# EAGLE board AtoVproject 16n V1.1 Panel (EAGLE 9.2.2)
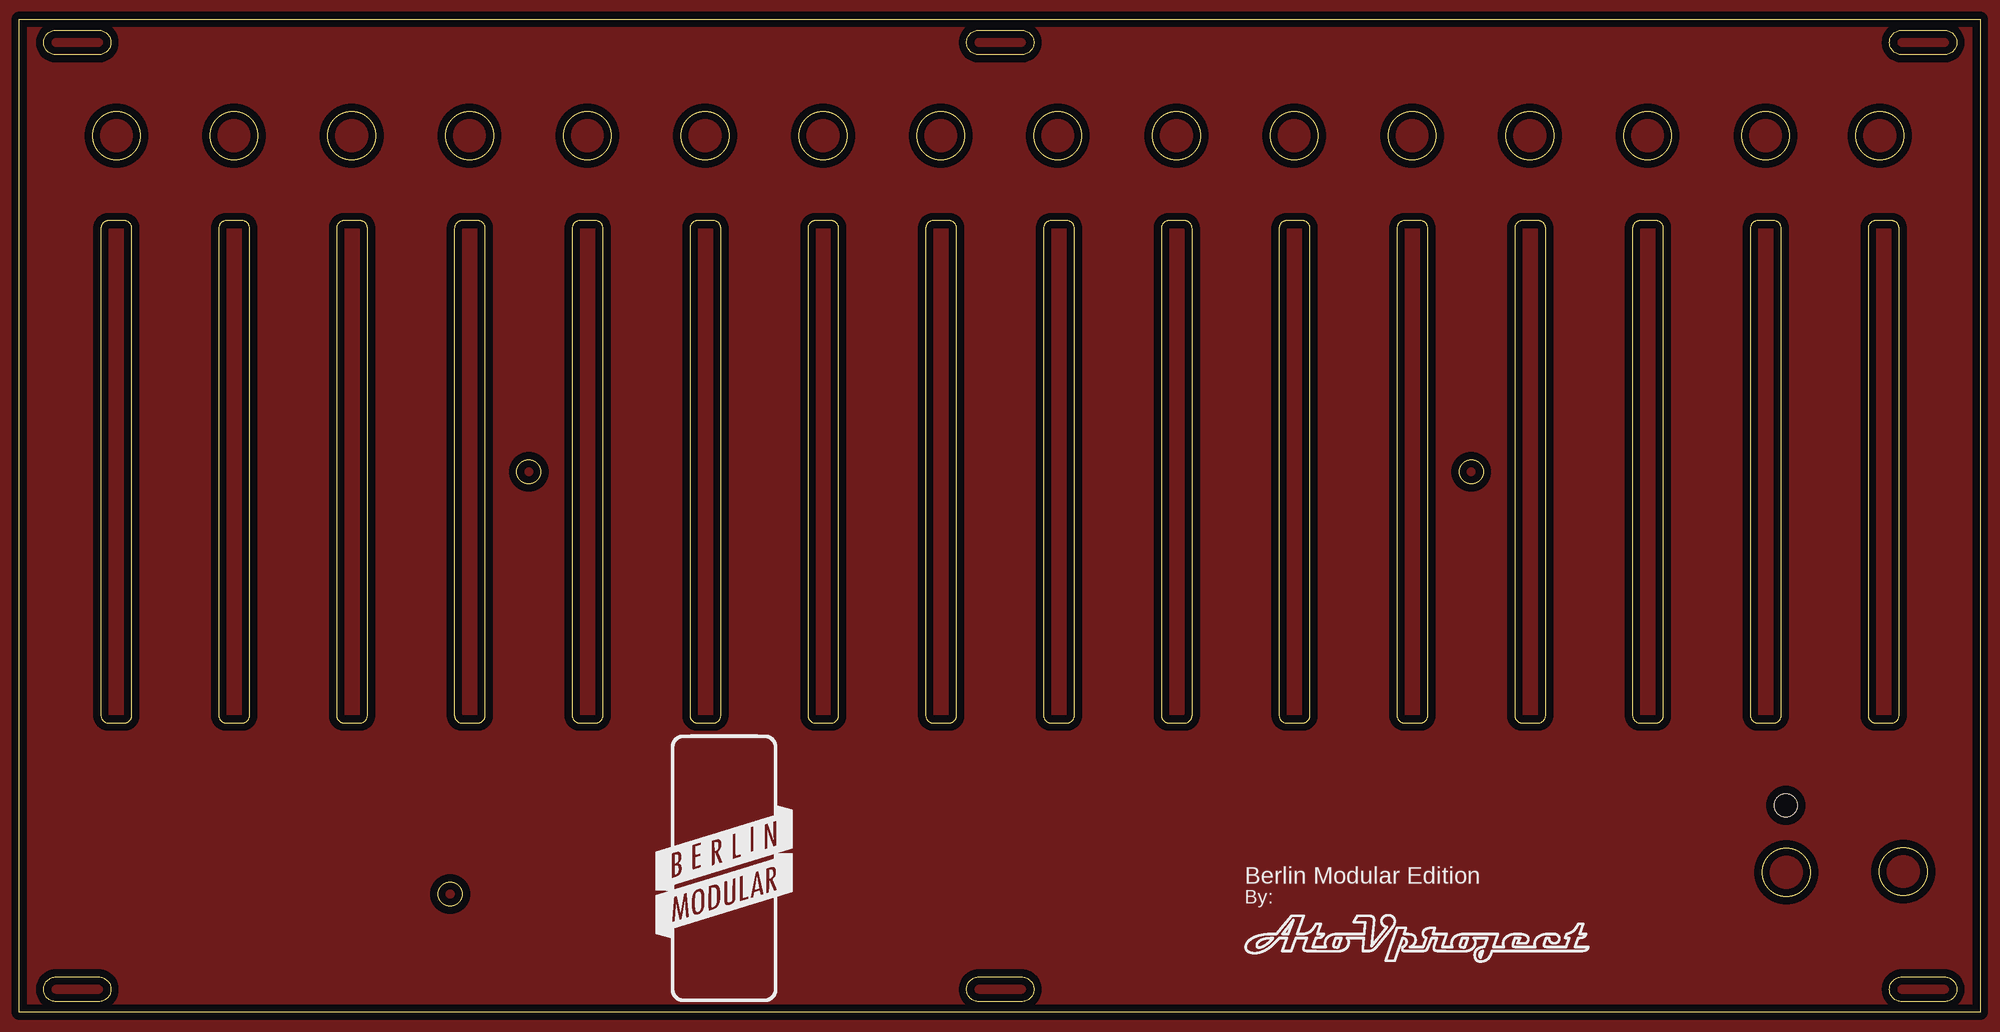
[diagram p0: board, top side]
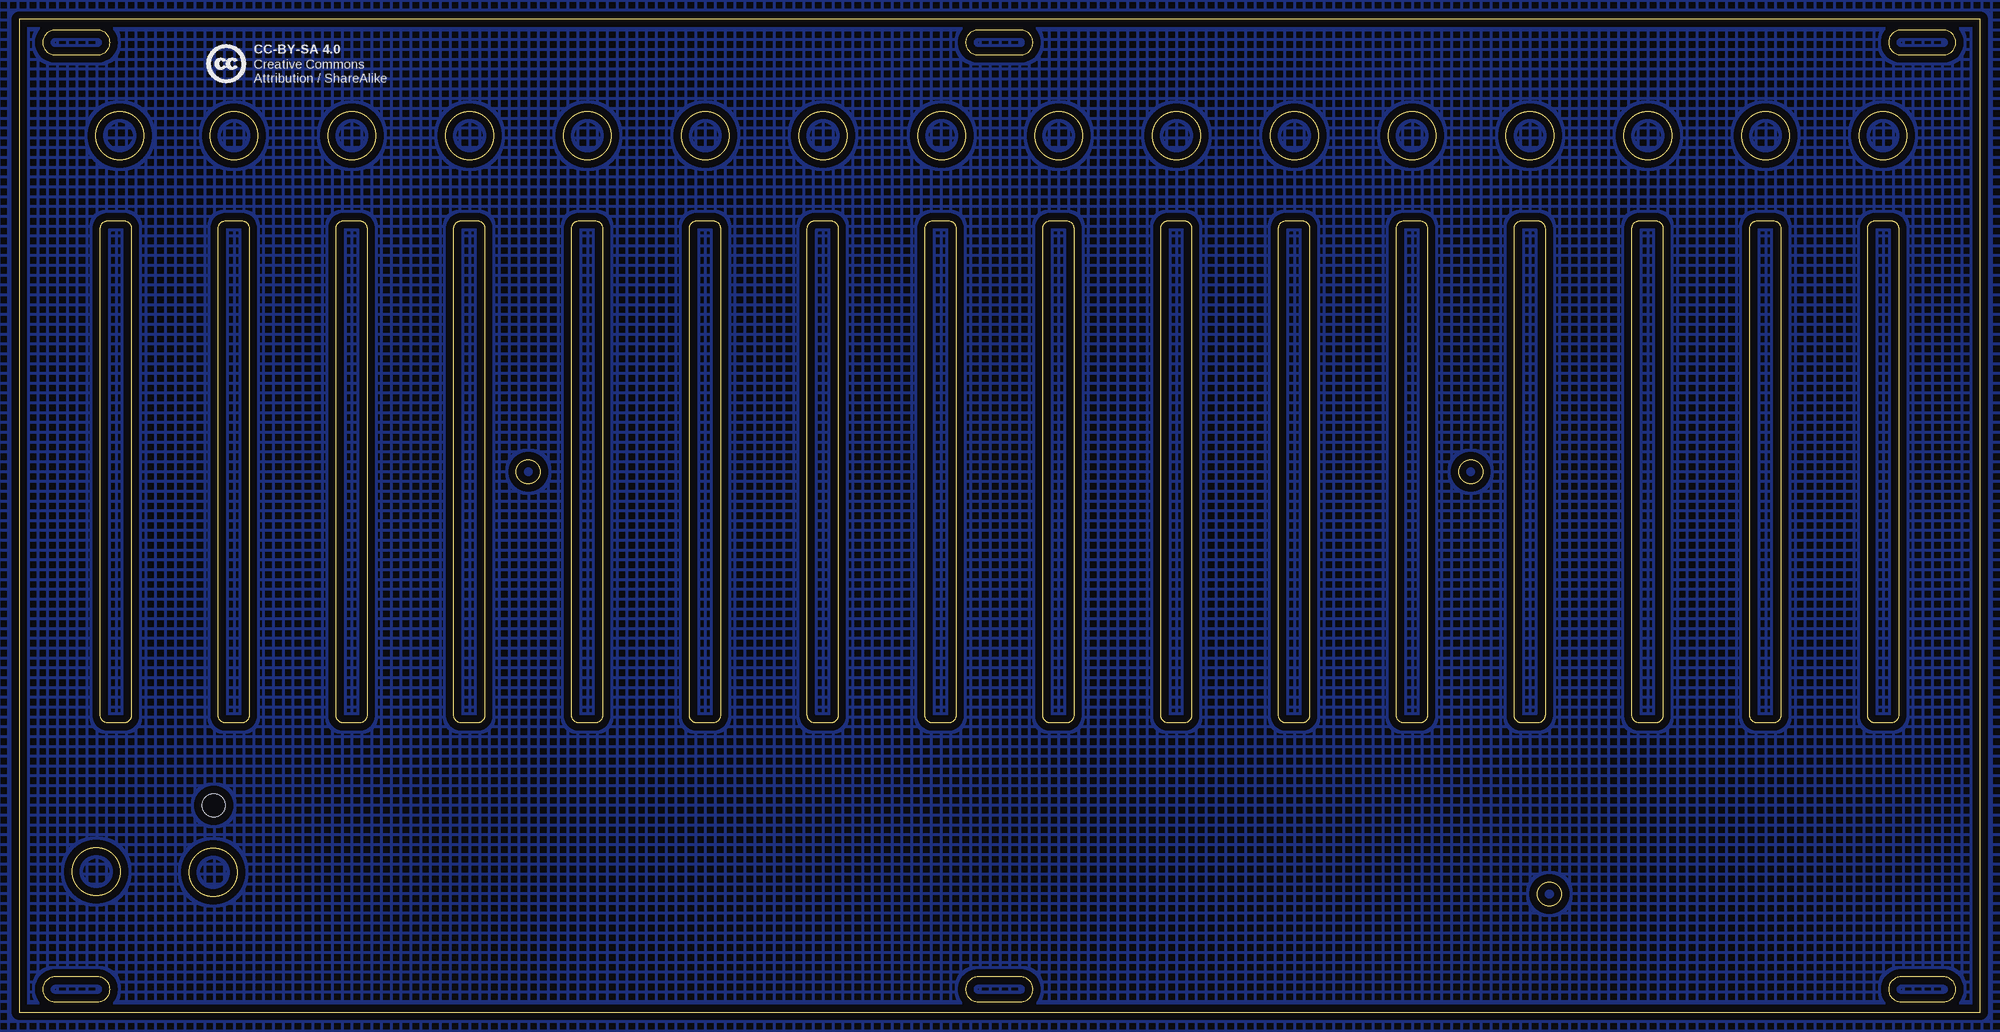
[diagram p1: board, bottom side, seen from below]

Size 253.64 x 128.5 mm. Coordinates in mm from the lower left corner, seen from the top.
Outline: 253.64,0 0,0 0,128.5 253.64,128.5 253.64,0
Outline: 4.75,123.9 arc-180 4.75,127.1 10.25,127.1 arc-180 10.25,123.9 4.75,123.9
Outline: 208.67,101.45 208.67,38.45 arc90 209.67,37.45 211.67,37.45 arc90 212.67,38.45 212.67,101.45 arc90 211.67,102.45 209.67,102.45 arc90 208.67,101.45
Outline: 147.71,101.45 147.71,38.45 arc90 148.71,37.45 150.71,37.45 arc90 151.71,38.45 151.71,101.45 arc90 150.71,102.45 148.71,102.45 arc90 147.71,101.45
Outline: 86.75,101.45 86.75,38.45 arc90 87.75,37.45 89.75,37.45 arc90 90.75,38.45 90.75,101.45 arc90 89.75,102.45 87.75,102.45 arc90 86.75,101.45
Outline: 25.79,101.45 25.79,38.45 arc90 26.79,37.45 28.79,37.45 arc90 29.79,38.45 29.79,101.45 arc90 28.79,102.45 26.79,102.45 arc90 25.79,101.45
Outline: 41.03,101.45 41.03,38.45 arc90 42.03,37.45 44.03,37.45 arc90 45.03,38.45 45.03,101.45 arc90 44.03,102.45 42.03,102.45 arc90 41.03,101.45
Outline: 101.99,101.45 101.99,38.45 arc90 102.99,37.45 104.99,37.45 arc90 105.99,38.45 105.99,101.45 arc90 104.99,102.45 102.99,102.45 arc90 101.99,101.45
Outline: 162.95,101.45 162.95,38.45 arc90 163.95,37.45 165.95,37.45 arc90 166.95,38.45 166.95,101.45 arc90 165.95,102.45 163.95,102.45 arc90 162.95,101.45
Outline: 223.91,101.45 223.91,38.45 arc90 224.91,37.45 226.91,37.45 arc90 227.91,38.45 227.91,101.45 arc90 226.91,102.45 224.91,102.45 arc90 223.91,101.45
Outline: 193.43,101.45 193.43,38.45 arc90 194.43,37.45 196.43,37.45 arc90 197.43,38.45 197.43,101.45 arc90 196.43,102.45 194.43,102.45 arc90 193.43,101.45
Outline: 132.47,101.45 132.47,38.45 arc90 133.47,37.45 135.47,37.45 arc90 136.47,38.45 136.47,101.45 arc90 135.47,102.45 133.47,102.45 arc90 132.47,101.45
Outline: 71.51,101.45 71.51,38.45 arc90 72.51,37.45 74.51,37.45 arc90 75.51,38.45 75.51,101.45 arc90 74.51,102.45 72.51,102.45 arc90 71.51,101.45
Outline: 14.55,38.45 14.55,101.45 arc90 13.55,102.45 11.55,102.45 arc90 10.55,101.45 10.55,38.45 arc90 11.55,37.45 13.55,37.45 arc90 14.55,38.45
Outline: 56.27,101.45 56.27,38.45 arc90 57.27,37.45 59.27,37.45 arc90 60.27,38.45 60.27,101.45 arc90 59.27,102.45 57.27,102.45 arc90 56.27,101.45
Outline: 117.23,101.45 117.23,38.45 arc90 118.23,37.45 120.23,37.45 arc90 121.23,38.45 121.23,101.45 arc90 120.23,102.45 118.23,102.45 arc90 117.23,101.45
Outline: 178.19,101.45 178.19,38.45 arc90 179.19,37.45 181.19,37.45 arc90 182.19,38.45 182.19,101.45 arc90 181.19,102.45 179.19,102.45 arc90 178.19,101.45
Outline: 239.15,101.45 239.15,38.45 arc90 240.15,37.45 242.15,37.45 arc90 243.15,38.45 243.15,101.45 arc90 242.15,102.45 240.15,102.45 arc90 239.15,101.45
Outline: 124.13,123.9 arc-180 124.13,127.1 129.63,127.1 arc-180 129.63,123.9 124.13,123.9
Outline: 243.51,1.4 arc-180 243.51,4.6 249.01,4.6 arc-180 249.01,1.4 243.51,1.4
Outline: 10.25,4.6 arc-180 10.25,1.4 4.75,1.4 arc-180 4.75,4.6 10.25,4.6
Outline: 124.13,1.4 arc-180 124.13,4.6 129.63,4.6 arc-180 129.63,1.4 124.13,1.4
Outline: 243.51,123.9 arc-180 243.51,127.1 249.01,127.1 arc-180 249.01,123.9 243.51,123.9
Outline: circle at 187.81,69.95 radius 1.55
Outline: circle at 65.89,69.95 radius 1.55
Outline: circle at 55.73,15.34 radius 1.55
Outline: circle at 164.91,113.45 radius 3.1
Outline: circle at 195.39,113.45 radius 3.1
Outline: circle at 210.63,113.45 radius 3.1
Outline: circle at 225.87,113.45 radius 3.1
Outline: circle at 58.23,113.45 radius 3.1
Outline: circle at 240.65,113.45 radius 3.1
Outline: circle at 42.99,113.45 radius 3.1
Outline: circle at 73.47,113.45 radius 3.1
Outline: circle at 228.57,18.14 radius 3.1
Outline: circle at 243.7,18.22 radius 3.1
Outline: circle at 27.75,113.45 radius 3.1
Outline: circle at 180.15,113.45 radius 3.1
Outline: circle at 149.67,113.45 radius 3.1
Outline: circle at 12.57,113.45 radius 3.1
Outline: circle at 134.31,113.45 radius 3.1
Outline: circle at 88.71,113.45 radius 3.1
Outline: circle at 103.95,113.45 radius 3.1
Copper layers (1*16): Top 0.035mm / dielectric 1.5mm / Bottom 0.035mm
Design rules "default": minimum track width 6mil, minimum drill 0.35mm, track to track 6mil, track to pad 6mil, pad to pad 6mil, via to via 6mil, smd to smd 6mil, copper to edge 40mil, drill to drill 6mil, minimum pad ring 10mil, minimum via ring 8mil, stop-mask expansion 4mil, vias tented up to drill 0mil, thermal gap 10mil
Holes 3 mm at 228.48,26.77

## Placement (x,y rotation side)
U$100  [BMLOGOSMALL]  82.3,1.37 0 top
U$101  [LOGO-ATOV]  158.5,6.45 0 top

## Library data of the parts
U$100 U$101 = AtoVproject

## Tracks (layer width: path | path; a pad name or v marks a point on that pad's centre or on a via)
GND
  pour Top: -5.33,137.26 265.18,137.26 265.18,-15.14 -5.33,-15.14
  pour Bottom (hatched): -10.41,155.04 -10.41,-16.41 271.53,-16.41 271.53,155.04

## Text on the board
tNames: Berlin Modular Edition | By:
bNames: CC-BY-SA 4.0 | Creative Commons / Attribution / ShareAlike
tStop: 16 | Sean Hellfritsch / Brian Crabtree / Tom Armitage / Brendon Cassidy | MIDI | I2C